# EAGLE board lcd_booster_mk3 (EAGLE 6.1)
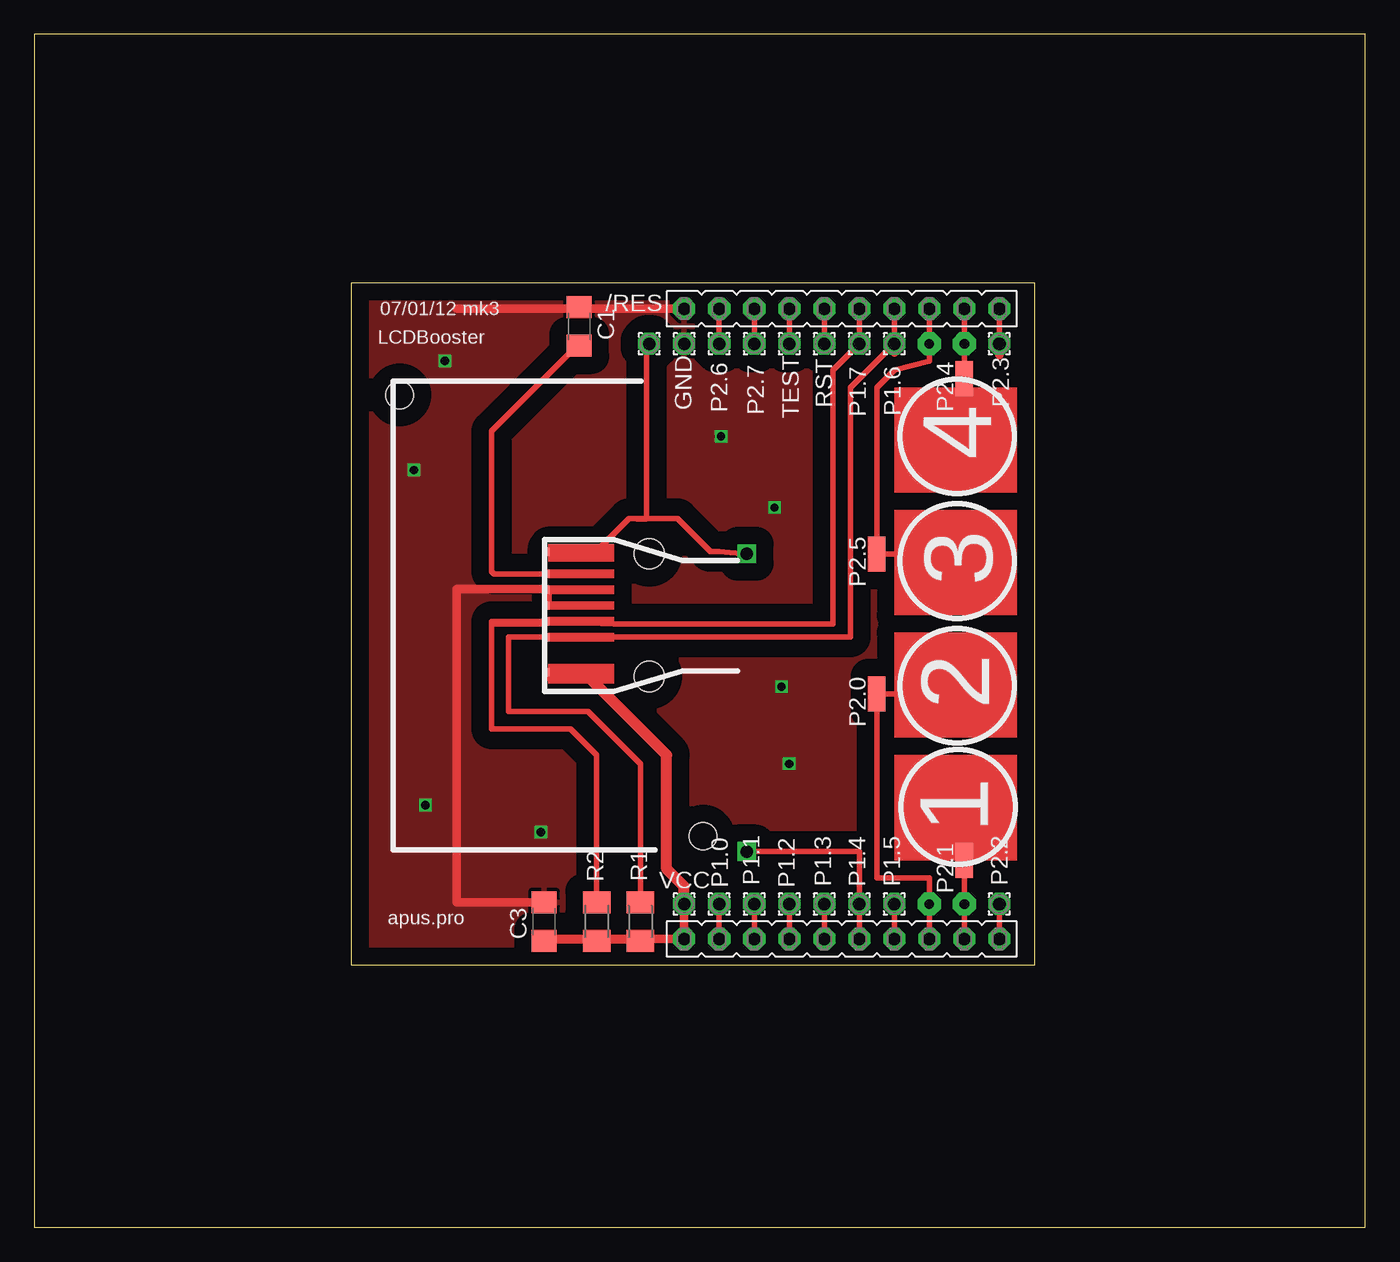
[diagram p0: board, top side]
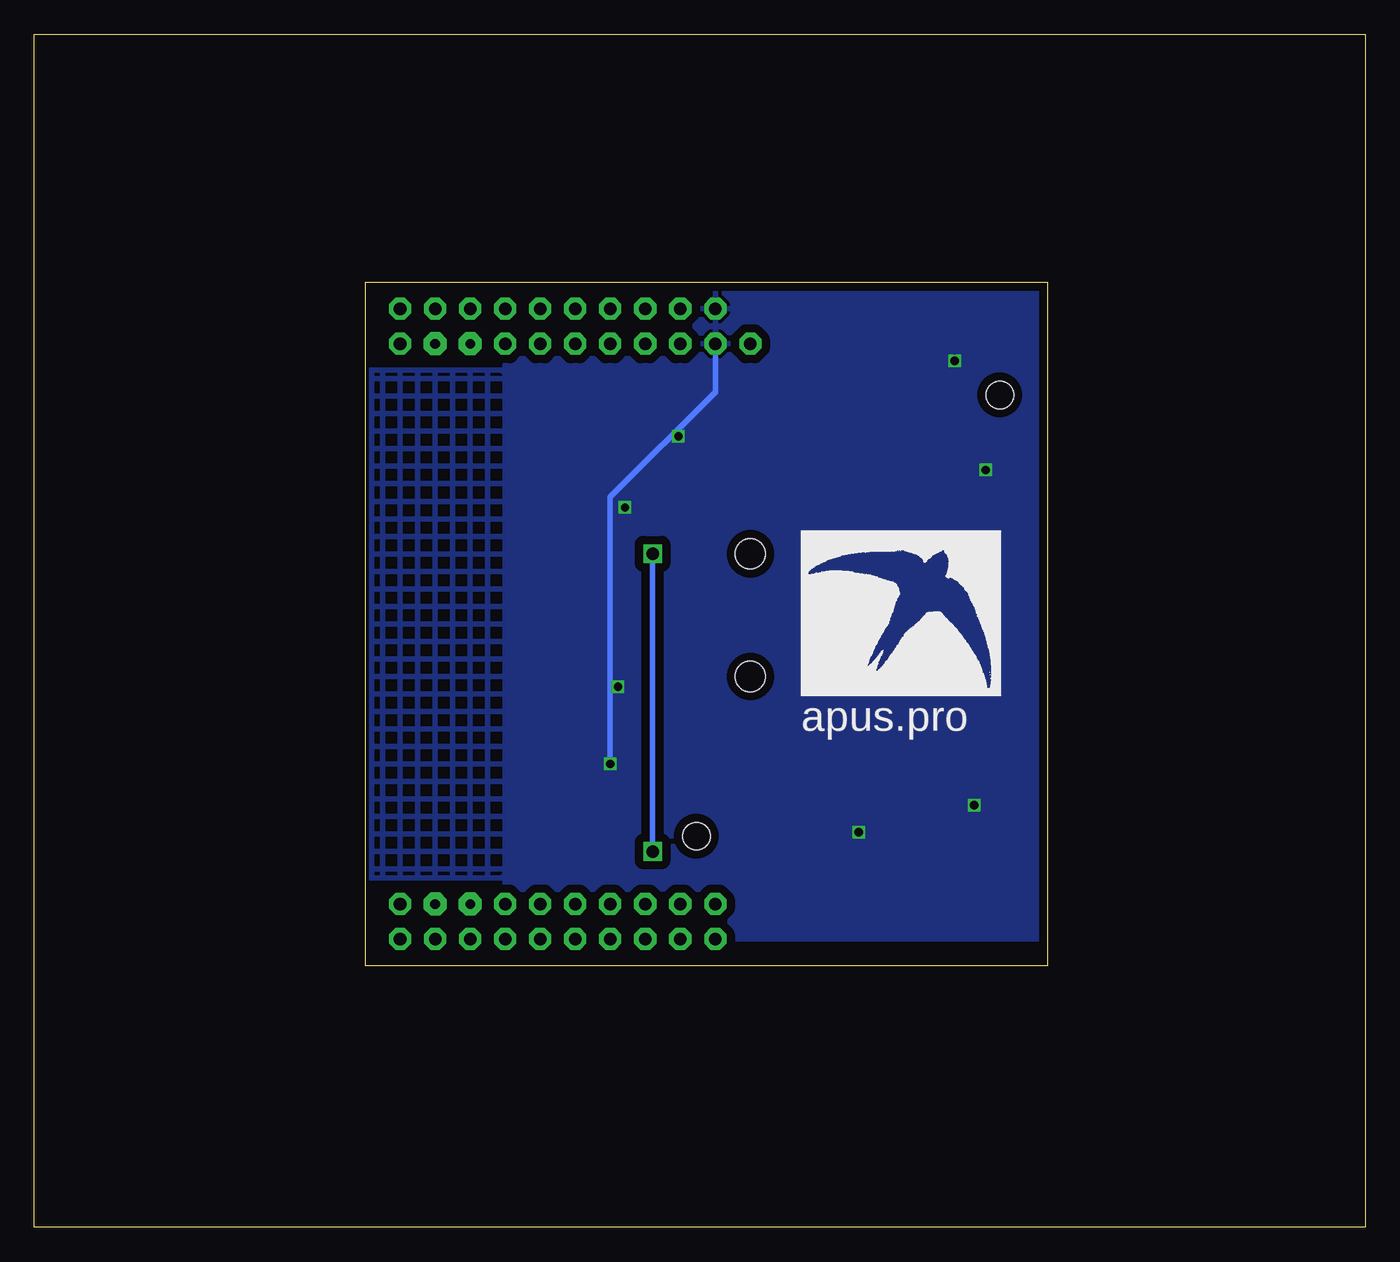
[diagram p1: board, bottom side, seen from below]

Size 96.52 x 86.52 mm. Coordinates in mm from the lower left corner, seen from the top.
Outline: 0,0 96.52,0 96.52,86.52 0,86.52 0,0
Copper layers (1*16): Top 0.035mm / dielectric 1.5mm / Bottom 0.035mm
Design rules: minimum track width 6mil, minimum drill 12mil, track to track 6mil, track to pad 6mil, pad to pad 6mil, via to via 6mil, smd to smd 0mil, copper to edge 10mil, drill to drill 10mil, minimum pad ring 10mil, minimum via ring 6mil, stop-mask expansion 2mil, vias tented up to drill 100mil, thermal gap 10mil
Holes 2.2 mm at 44.59,48.84 44.59,39.95
Holes 2 mm at 26.5,60.36 48.5,28.36

## Footprints (pad centres in the part's own frame; a part is rotated, then mirrored left to right if it is on the bottom)
1,6/0,9 = drill 0.914 pad 1.6 octagon: 1 0,0
C1206 = smd 1.6 x 1.8: 1 -1.4,0; 2 1.4,0
SMD1,27-2,54 = smd 1.27 x 2.54: 1 0,0
M1206 = smd 1.6 x 2: 1 -1.4,0; 2 1.4,0
PE9665ARF = smd 0.61 x 0.305: /RES 6.5,4.85; SAO 2.6,4.85; SCL 0.3,4.85; SDA 1.45,4.85; VDD -2.25,4.85; VLCD 4.9,4.85; VSS 3.75,4.85
LAUNCHPAD-50MM-LEFT = drill 0.914 pad 1.6 octagon: GND 24.13,48.26; P1.0 26.67,2.54; P1.1 29.21,2.54; P1.2 31.75,2.54; P1.3 34.29,2.54; P1.4 36.83,2.54; P1.5 39.37,2.54; P1.6 39.37,48.26; P1.7 36.83,48.26; P2.0 41.91,2.54; P2.1 44.45,2.54; P2.2 46.99,2.54; P2.3 46.99,48.26; P2.4 44.45,48.26; P2.5 41.91,48.26; P2.6 26.67,48.26; P2.7 29.21,48.26; RST 34.29,48.26; TEST 31.75,48.26; VCC 24.13,2.54

## Placement (x,y rotation side)
/RES  [1,6/0,9]  44.59,64.08 0 top
C1  [C1206]  39.51,65.36 270 top
C3  [C1206]  36.97,22.17 90 top
GND  [1,6/0,9]  47.13,64.08 0 top
P1.0  [1,6/0,9]  49.67,23.45 0 top
P1.1  [1,6/0,9]  52.21,23.45 0 top
P1.2  [1,6/0,9]  54.75,23.45 0 top
P1.3  [1,6/0,9]  57.29,23.45 0 top
P1.4  [1,6/0,9]  59.83,23.45 0 top
P1.5  [1,6/0,9]  62.37,23.45 0 top
P1.6  [1,6/0,9]  62.37,64.08 0 top
P1.7  [1,6/0,9]  59.83,64.08 0 top
P2.0  [SMD1,27-2,54]  61.1,38.69 0 top
P2.1  [SMD1,27-2,54]  67.45,26.62 0 top
P2.2  [1,6/0,9]  69.99,23.45 0 top
P2.3  [1,6/0,9]  69.99,64.08 0 top
P2.4  [SMD1,27-2,54]  67.45,61.55 0 top
P2.5  [SMD1,27-2,54]  61.1,48.84 0 top
P2.6  [1,6/0,9]  49.67,64.08 0 top
P2.7  [1,6/0,9]  52.21,64.08 0 top
R1  [M1206]  43.95,22.17 90 top
R2  [M1206]  40.78,22.17 90 top
RST  [1,6/0,9]  57.29,64.08 0 top
TEST  [1,6/0,9]  54.75,64.08 0 top
U$2  PE9665ARF  [PE9665ARF]  42.05,42.49 90 top
U$3  LAUNCHPAD-50MM-LEFT  [LAUNCHPAD-50MM-LEFT]  23,18.36 0 top
VCC  [1,6/0,9]  47.13,23.45 0 top

## Library data of the parts
/RES GND P1.0 P1.1-P1.7 P2.0 P2.1-P2.7 RST TEST VCC = wirepad
C1 C3 = rcl
R1 R2 = resistor
U$2 = apus
U$3 = TI_launchpad

## Nets
/RES: /RES.1 P1.4.1 U$2./RES U$3.P1.4
GND: C1.1 C3.2 GND.1 U$2.SAO U$2.VSS U$3.GND
N$1: P2.2.1 U$3.P2.2
N$2: P1.3.1 U$3.P1.3
N$3: P1.0.1 U$3.P1.0
N$4: P2.1.1 U$3.P2.1
N$6: C1.2 U$2.VLCD
N$9: P2.0.1 U$3.P2.0
N$11: P1.5.1 U$3.P1.5
N$14: P1.2.1 U$3.P1.2
N$15: P1.1.1 U$3.P1.1
N$25: C3.1 R1.1 R2.1 U$2.VDD U$3.VCC VCC.1
P1.6: P1.6.1 R1.2 U$2.SCL U$3.P1.6
P1.7: P1.7.1 R2.2 U$2.SDA U$3.P1.7
P2.3: P2.3.1 U$3.P2.3
P2.4: P2.4.1 U$3.P2.4
P2.5: P2.5.1 U$3.P2.5
P2.6: P2.6.1 U$3.P2.6
P2.7: P2.7.1 U$3.P2.7
RST: RST.1 U$3.RST
TEST: TEST.1 U$3.TEST

## Tracks (layer width: path | path; a pad name or v marks a point on that pad's centre or on a via)
/RES  (via drill 0.9)
  Top 0.406: U$3.P1.4 P1.4.1 59.83,27.25 v51.67,27.25 | v51.67,48.84 49.67,48.99 49.05,48.99 | 49.05,48.99 46.64,51.41 43.68,51.41 | 43.68,51.41 43.12,51.41 40.52,48.8 37.39,48.8 U$2./RES | 49.05,48.99 49.01,48.99 | /RES.1 44.4,63.89 44.4,51.41 44.36,51.36 43.72,51.36 43.68,51.41
  Bottom 0.406: v51.67,48.84 v51.67,27.25
GND  (via drill 0.6)
  Top 0.61: U$2.SAO U$2.VSS 37.2,46.3 30.62,46.3 30.62,23.57 C3.2 | U$3.GND 30.62,66.62
  Bottom 0.406: v54.75,33.6 54.75,52.95 47.11,60.59 47.11,64.06 GND.1
  other vias: 28.36,30.6 36.72,28.64 54.19,39.2 53.68,52.2 49.8,57.36 29.76,62.84 27.52,54.92
  pour Top (isolate 1.27): 23.64,20.27 71.9,20.27 71.9,67.89 23.64,67.89
  pour Bottom (isolate 0.61): 23,67.89 23,20.9 62.37,20.9 62.37,67.89
N$1
  Top 0.406: P2.2.1 U$3.P2.2
N$2
  Top 0.406: U$3.P1.3 P1.3.1
N$3
  Top 0.406: U$3.P1.0 P1.0.1
N$4  (via drill 0.7 pad 1.68)
  Top 0.406: U$3.P2.1 v67.45,23.45 P2.1.1
N$6
  Top 0.406: U$2.VLCD 33.34,47.39 33.16,47.58 33.16,57.73 39.51,64.08 C1.2
N$9  (via drill 0.7 pad 1.68)
  Top 0.406: 63.64,38.69 P2.0.1 61.1,25.35 64.91,25.35 v64.91,23.45 U$3.P2.0
N$10
  pour Bottom (hatched): 62.37,62.18 72.53,62.18 72.53,25.35 62.37,25.35
N$11
  Top 0.406: U$3.P1.5 P1.5.1
N$14
  Top 0.406: U$3.P1.2 P1.2.1
N$15
  Top 0.406: U$3.P1.1 P1.1.1
N$25
  Top 0.152: 44.59,20.9 R1.1
  Top 0.406: C3.1 R2.1 44.46,20.77 44.59,20.9 U$3.VCC 47,21.03
  Top 0.61: U$2.VDD 37.2,39.95 40.14,39.95 | VCC.1 U$3.VCC 36.97,20.9
  Top 0.813: VCC.1 47.13,24.71 45.86,25.98 45.86,34.24 40.14,39.95
P1.6
  Top 0.152: 44.59,23.45 R1.2
  Top 0.406: U$3.P1.6 P1.6.1 59.2,60.91 59.2,42.8 U$2.SCL 34.4,42.8 34.4,37.41 34.41,37.41 40.14,37.41 43.95,33.6 R1.2 43.95,23.45 44.59,23.45
  Top 0.61: 62.37,63.45 P1.6.1
P1.7
  Top 0.406: U$3.P1.7 P1.7.1 57.92,62.18 57.92,43.77 42.05,43.77 U$2.SDA 33.16,43.94 33.16,43.77 | 33.16,43.77 33.16,36.14 38.88,36.14 40.78,34.24 R2.2 | 33.16,43.77 36.97,43.77 | R2.2 40.78,24.08 | R2.2 40.78,23.45
P2.3
  Top 0.406: U$3.P2.3 P2.3.1
  Top 0.61: 69.99,63.25 P2.3.1
P2.4  (via drill 0.7 pad 1.68)
  Top 0.406: U$3.P2.4 v67.45,64.08 P2.4.1
P2.5  (via drill 0.7 pad 1.68)
  Top 0.406: U$3.P2.5 v64.91,64.08 64.91,62.81 62.37,62.18 61.1,60.91 P2.5.1 64.91,48.84
P2.6
  Top 0.406: U$3.P2.6 P2.6.1
P2.7
  Top 0.406: U$3.P2.7 P2.7.1
RST
  Top 0.406: U$3.RST RST.1
TEST
  Top 0.406: U$3.TEST TEST.1
(copper drawn outside any net)
  shapes: Top area x4

## Text on the board
tPlace: 07/01/12 mk3 | LCDBooster | 4 | 3 | 2 | 1 | apus.pro
bPlace: apus.pro
200bmp: 1